# Altium PCB PCB1.PcbDoc
Units mm, origin at the board's own origin, x right, y up, seen from the top; angles counter-clockwise.
Board outline 89.03 x 95.25 mm, 2 copper layers (Top Layer, Bottom Layer); 53 components, 38 nets, 170 pads, 24 vias.
Unrouted connection lines stored in the file: 2.
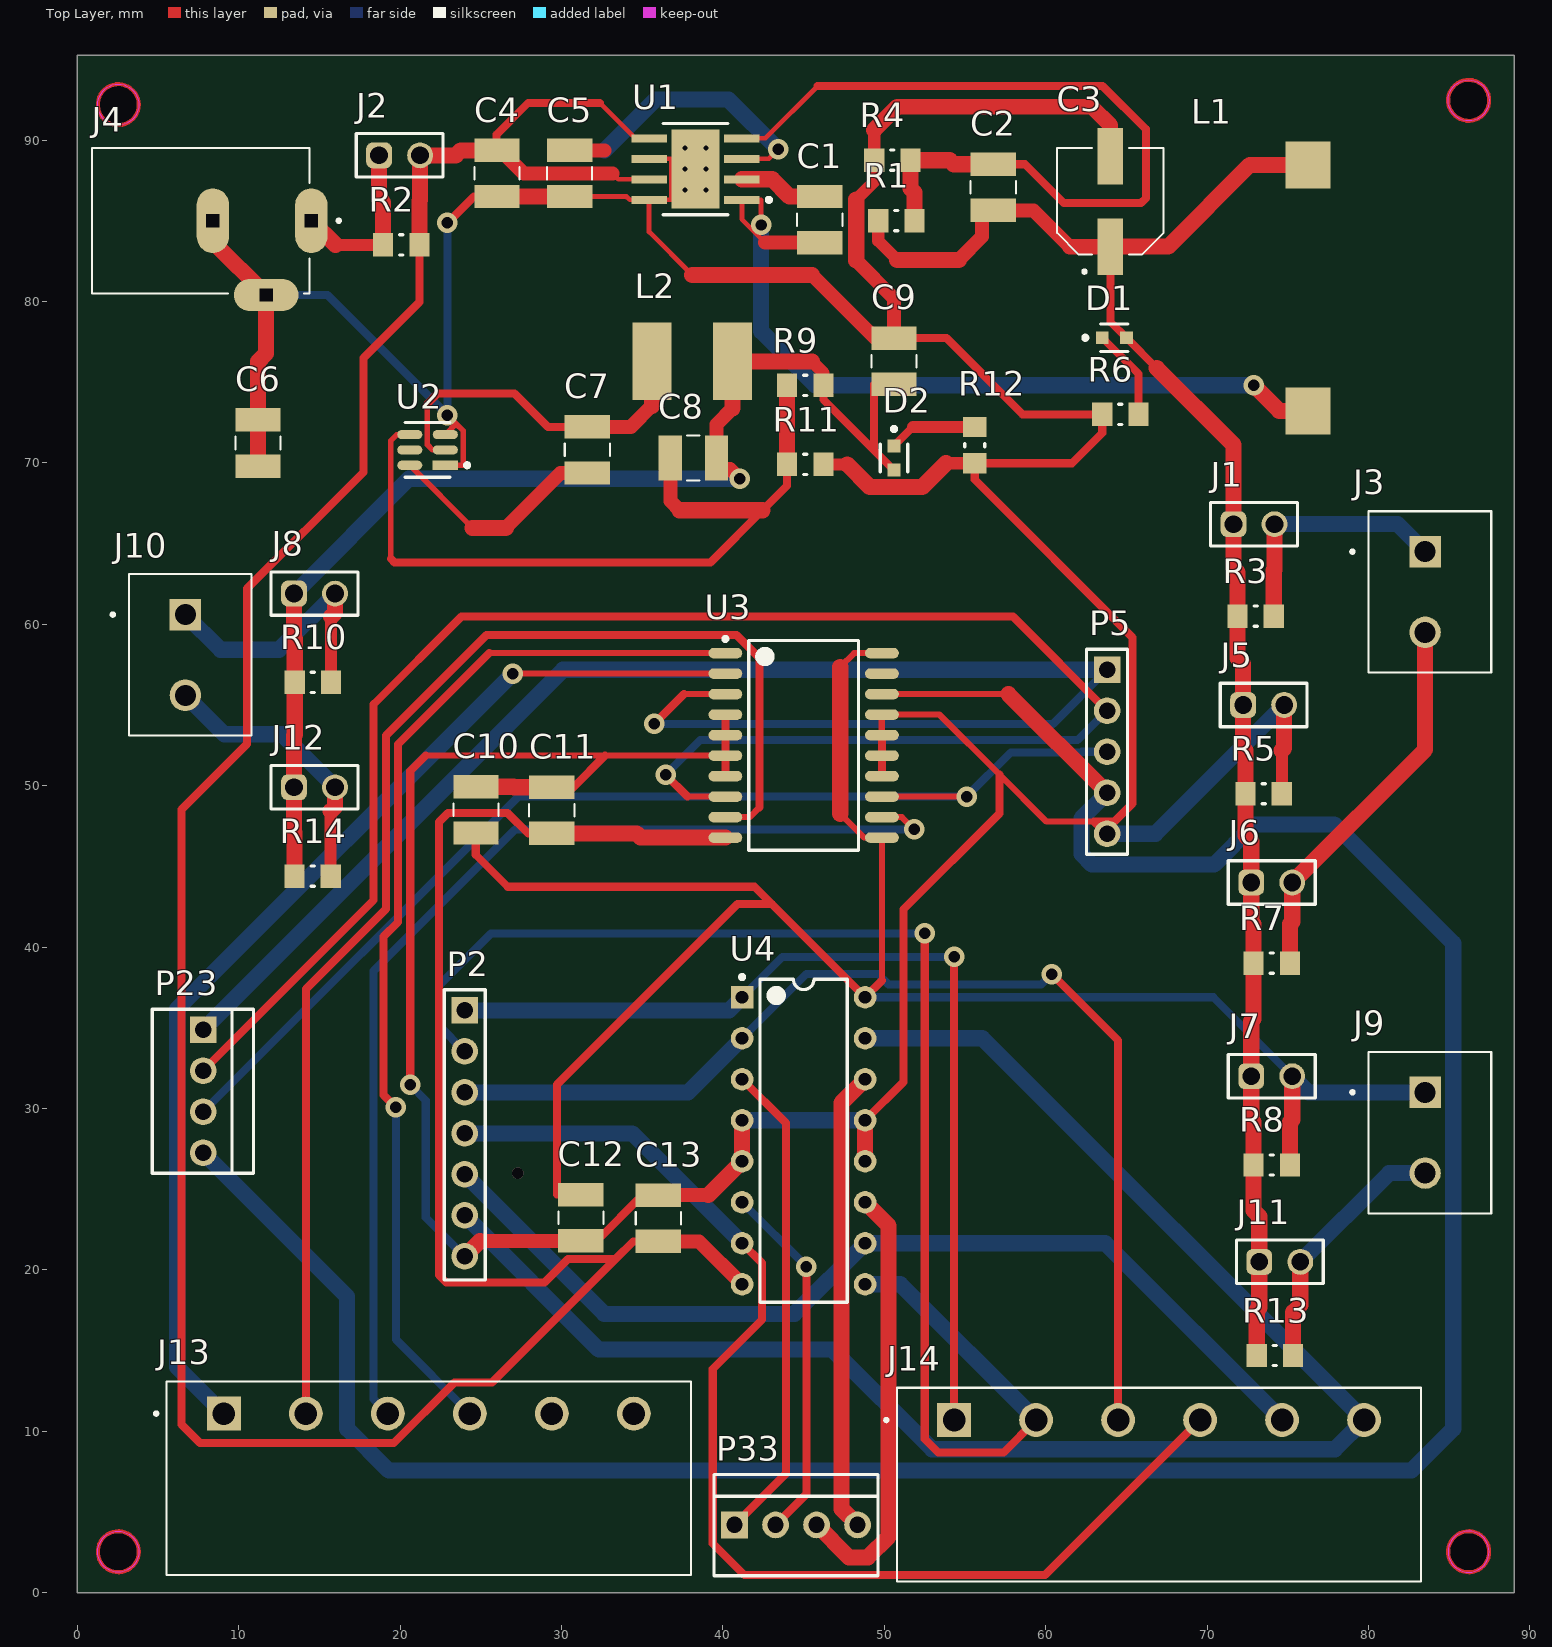
[diagram p0: Top Layer view]
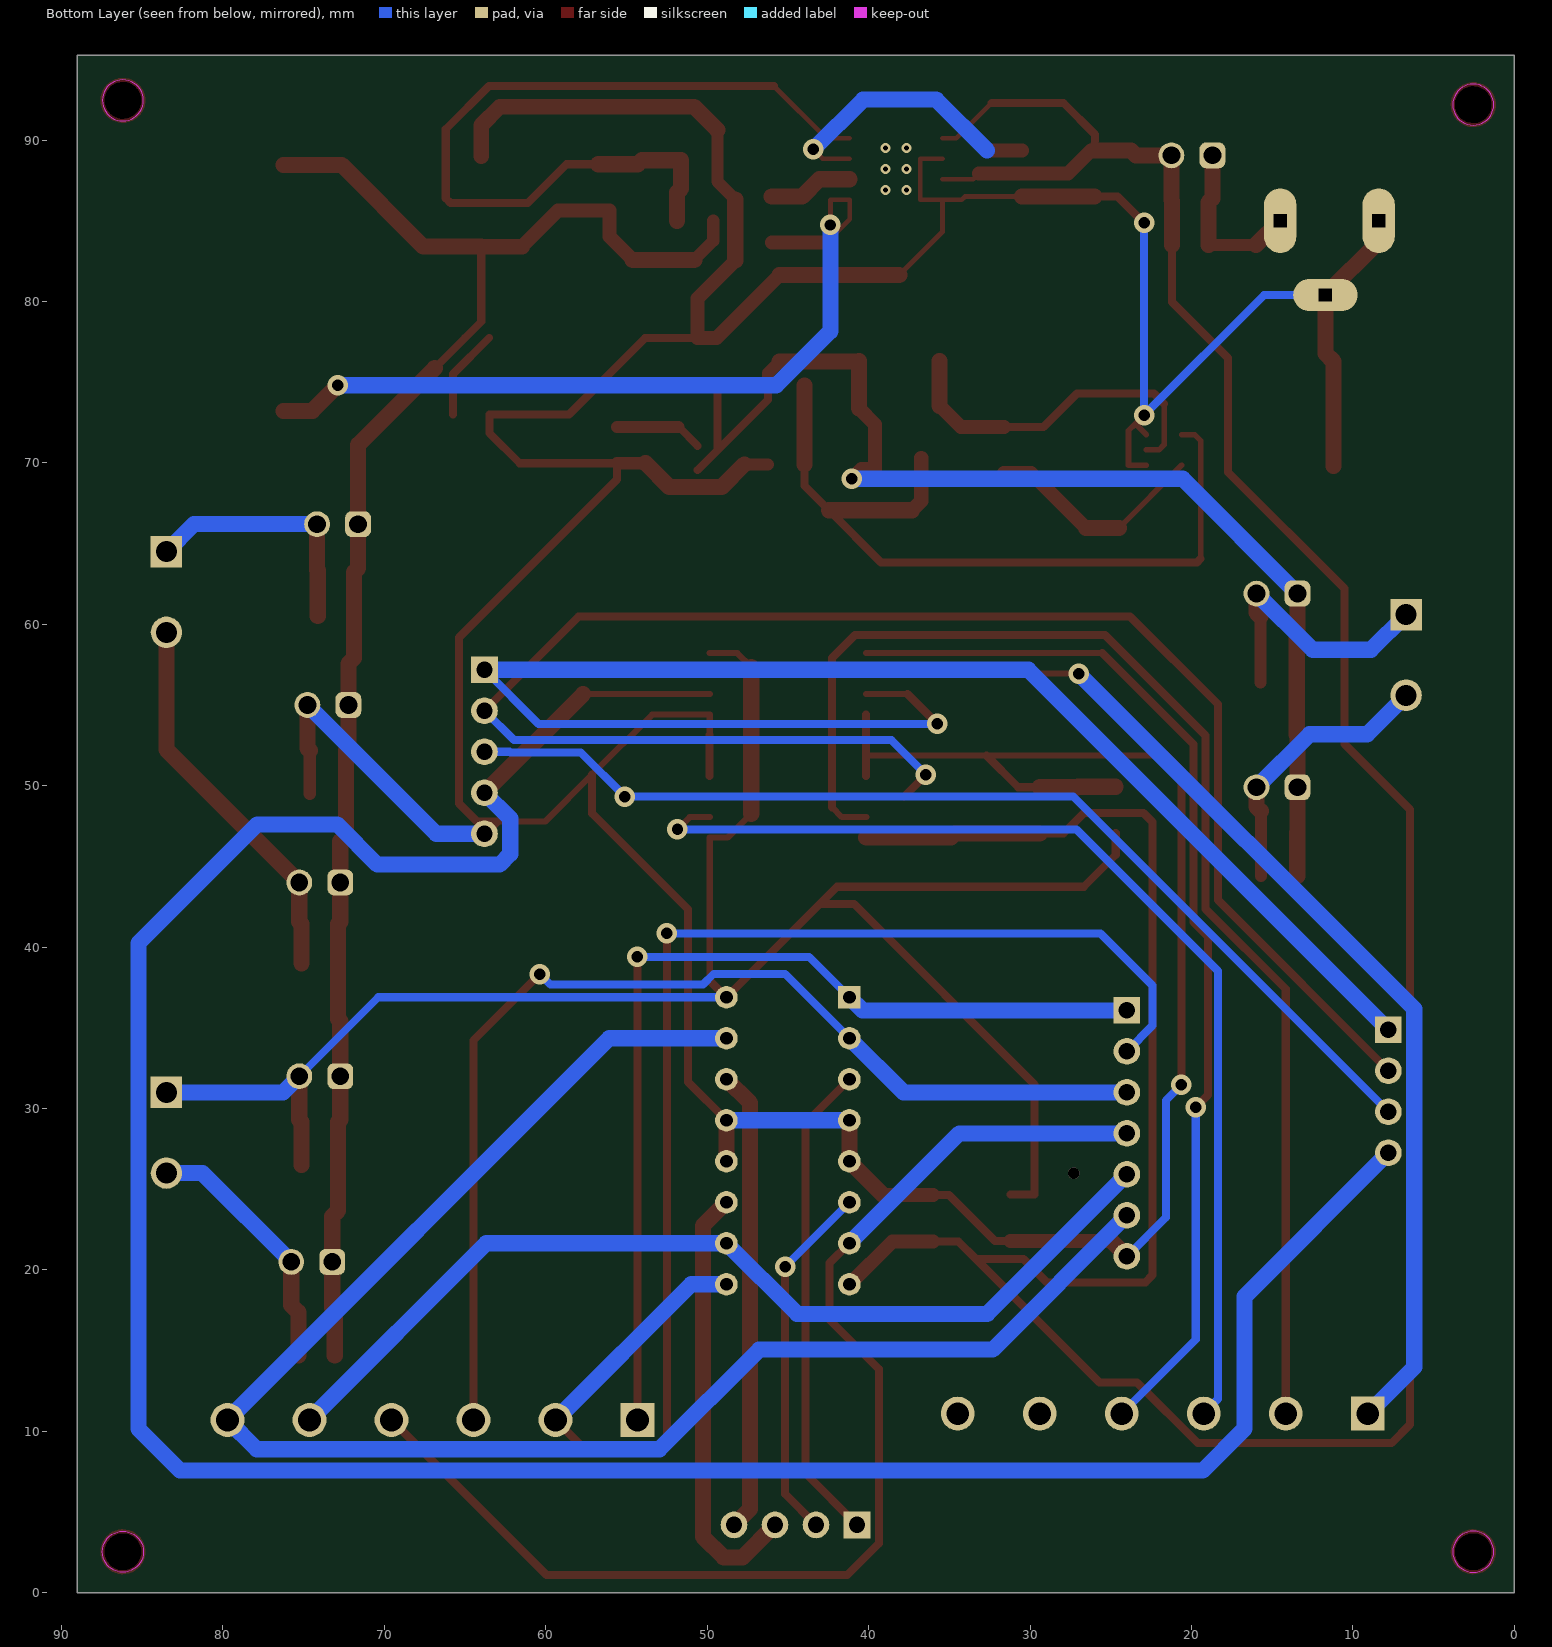
[diagram p1: Bottom Layer view, seen from below]

## Layer stack, top to bottom
Top Solder: solder mask 0.0102, Solder Resist, Dk 3.5
Top Layer: signal copper 0.0356
Dielectric 1: dielectric 0.32, FR-4, Dk 4.8
Bottom Layer: signal copper 0.0356
Bottom Solder: solder mask 0.0102, Solder Resist, Dk 3.5

## Board outline
0,0 89.027,0 89.027,95.25 0,95.25
cut-out: 84.93,2.54 ccw(c86.2,2.54) 86.2,1.27 ccw(c86.2,2.54) 87.47,2.54 ccw(c86.2,2.54) 86.2,3.81 ccw(c86.2,2.54)
cut-out: 86.2,91.186 cw(c86.2,92.456) 84.93,92.456 cw(c86.2,92.456) 86.2,93.726 cw(c86.2,92.456) 87.47,92.456 cw(c86.2,92.456)
cut-out: 2.54,90.92 cw(c2.54,92.19) 1.27,92.19 cw(c2.54,92.19) 2.54,93.46 cw(c2.54,92.19) 3.81,92.19 cw(c2.54,92.19)
cut-out: 2.54,1.27 cw(c2.54,2.54) 1.27,2.54 cw(c2.54,2.54) 2.54,3.81 cw(c2.54,2.54) 3.81,2.54 cw(c2.54,2.54)

## Design rules (kind name [scope] priority, off if disabled: settings)
Clearance [All] p1: gap=0.254 ignorepadtopadclearanceinfootprint=FALSE except(0: Arc-Hole Track-Hole SMDPad-Hole THPad-Hole Via-Hole Fill-Hole Poly-Hole Region-Hole Text-Hole; 0.127: Arc-SMDPad Track-SMDPad SMDPad-SMDPad)
PolygonConnect [All] p1: connectstyle=Relief reliefconductorwidth=0.254 reliefentries=4 polygonreliefangle="90 Angle" airgapwidth=0.254
RoutingVias [All] p1: holewidth=0.711 width=1.27 viastyle="Through Hole" minholewidth=0.711 minwidth=1.27 maxholewidth=0.711 maxwidth=1.27
SMDNeckDown [All] p1: percent=60.000
SolderMaskExpansion [All] p1: expansion=0.102 istentingtop=FALSE
Width [All] p1: maxlimit=1 minlimit=0.25 preferedwidth=0.5 minimp=50.000000 maximp=50.000000 favimp=50.000000
30 further rules are at their usual default settings.

## Classes and differential pairs
component class Headers: DPWR? J13 J14 P23 P33
component class "Motor Drivers": C10 C11 C12 C13 P2 P5 U3 U4

## Components (designator, comment, footprint, x,y, rotation, side; value= is the part's Value field where it differs from the comment)
C1 "100nF" "10 uF Cap" 46,85.07 r270 top
C2 "30pF" "10 uF Cap" 56.75,87.07 r90 top
C3 "120uF" "Capacitor 120uF" 64,86.2 r90 top
C4 "10uF" "10 uF Cap" 26,87.93 r270 top
C5 "2.2uF" "10 uF Cap" 30.5,87.93 r270 top
C6 "10uF" "10 uF Cap" 11.2,71.23 r90 top
C7 "100nF" "10 uF Cap" 31.6,70.8 r270 top
C8 "47pF" "10 uF Cap" 38.17,70.3 r180 top
C9 "47pF" "10 uF Cap" 50.6,76.3 r90 top
C10 "1uF" "10 uF Cap" 24.7,48.5 r90 top
C11 "1uF" "10 uF Cap" 29.4,48.47 r90 top
C12 "1uF" "10 uF Cap" 31.2,23.23 r270 top
C13 "1uF" "10 uF Cap" 36,23.2 r90 top
D1 "LTST-C190GKT" FP-LTST-C190GKT-MFG 64.25,77.75 r0 top
D2 "LTST-C190GKT" FP-LTST-C190GKT-MFG 50.6,70.3 r270 top
J1 "61300211121" 61300211121 72.9,66.2 r0 top
J2 "61300211121" 61300211121 19.97,89.05 r0 top
J3 "Screw Type Terminal" "2 Pin Terminal Blue Screw" 83.5,64.5 r270 top
J4 "DC Power Jack" GRAVITECH_CON-SOCJ-2155 8.4,85 r0 top
J5 "61300211121" 61300211121 73.5,55 r0 top
J6 "61300211121" 61300211121 74,44 r0 top
J7 "61300211121" 61300211121 74,32 r0 top
J8 "61300211121" 61300211121 14.7,61.9 r0 top
J9 "Screw Type Terminal" "2 Pin Terminal Blue Screw" 83.5,31 r270 top
J10 "Screw Type Terminal" "2 Pin Terminal Blue Screw" 6.7,60.6 r270 top
J11 "61300211121" 61300211121 74.5,20.5 r0 top
J12 "61300211121" 61300211121 14.7,49.9 r0 top
J13 "Pluggable Header 6pos" PHOENIX_1757284 5.54,1.1 r0 top
J14 "Pluggable Header 6pos" PHOENIX_1757284 50.78,0.7 r0 top
L1 "15uH" "15uH Inductor" 76.25,75.25 r0 top
L2 "10uH" "10uH Inductor" 38.1,76.3 r270 top
P2 "Header 7" HDR1X7 24,36.08 r270 top
P5 "Header 5" HDR1X5 63.8,57.18 r270 top
P23 "Molex_22-11-2042" MOLEX-22-11-2042 7.8,34.88 r270 top
P33 "Molex_22-11-2042" MOLEX-22-11-2042 40.72,4.2 r0 top
R1 "88.7k" RESC2112X05M 50.75,85 r180 top
R2 "0R" RESC2112X05M 20.075,83.5 r0 top
R3 "0R" RESC2112X05M 73,60.5 r0 top
R4 "22.1k" RESC2112X05M 50.5,88.75 r0 top
R5 "0R" RESC2112X05M 73.5,49.5 r0 top
R6 "160R" RESC2112X05M 64.625,73 r0 top
R7 "0R" RESC2112X05M 74,39 r0 top
R8 "0R" RESC2112X05M 74,26.5 r0 top
R9 "100k" RESC2112X05M 45.1,74.8 r0 top
R10 "0R" RESC2112X05M 14.6,56.4 r0 top
R11 "22.1k" RESC2112X05M 45.1,69.9 r180 top
R12 "50R" RESC2112X05M 55.6,71.1 r90 top
R13 "0R" RESC2112X05M 74.2,14.7 r0 top
R14 "0R" RESC2112X05M 14.575,44.4 r0 top
U1 "LMR23630ADDAR" FP-DDA0008E-MFG 38.3,88.2 r180 top
U2 "TPS54202DDCR" FP-DDC0006A-IPC_B 21.7,70.8 r180 top
U3 "L293DD" STM-SOIC-20_M 45,52.5 r0 top
U4 "L293DD" STM-L293D-16 45,28 r0 top

## Footprints (in the part's own frame and the unit in brackets; to place one, negate y for a bottom-side part, rotate by r counter-clockwise, add the part's x,y. Pads: shape width x height; smd on the part's side, far side on the other; paste and mask are expansions set on the pad)
"2 Pin Terminal Blue Screw" [mm]
  rect 1.95x1.95 / inner round 1.95 / far side rect 1.95x1.95 hole 1.3: 1(0,0)
  round 1.95 hole 1.3: 2(5,0)
  silkscreen extent -2.5,-4.6 7.5,4.1
"10 uF Cap" [mm] "1210 footprint"
  rect 1.45x2.81 smd: 1(-1.43,0) 2(1.43,0)
  silkscreen extent -0.39,-1.4 0.39,1.4
"10uH Inductor" [mm] "10 µH Unshielded Wirewound Inductor 2.6 A 60mOhm Max 2424 (6060 Metric)"
  rect 4.8x2.4 smd: 1(0,-2.5) 2(0,2.5)
"15uH Inductor" [mil] "FIXED IND 15UH 4A 36 MOHM SMD"
  rect 110x115 smd: 1(0,-80) 2(0,520)
  body extent -285,-146 306,582, height 267
61300211121 [mm] "Pin Header, pitch 2.54 mm, THT, Vertical, single row, 2p"
  rrect50% 1.6x1.6 hole 1.1: 1(-1.27,0)
  round 1.6 hole 1.1: 2(1.27,0)
  silkscreen extent -2.69,-1.35 2.69,1.35, body extent -2.54,-1.27 2.54,1.27, height 8.57
"Capacitor 120uF" [mm]
  rect 3.5x1.6 smd: 1(-2.8,0) 2(2.8,0)
  silkscreen extent -4.45,-3.3 3.3,3.3
FP-DDA0008E-MFG [mm]
  rect 2.2x0.5 smd paste-1000 mask+0: 1(-2.875,1.905) 2(-2.875,0.635) 3(-2.875,-0.635) 4(-2.875,-1.905) 5(2.875,-1.905) 6(2.875,-0.635) 7(2.875,0.635) 8(2.875,1.905)
  rect 2.95x4.9 smd paste-1000 mask-1000: 9(0,0)
  silkscreen extent -4.68,-2.83 2,2.83, body extent -4.08,-2.68 4.08,2.68, height 0.25
FP-DDC0006A-IPC_B [mm]
  rect 1.554x0.572 smd paste+0 mask+0: 1(-1.1,0.95)
  rrect100% 1.554x0.572 smd paste+0 mask+0: 2(-1.1,0) 3(-1.1,-0.95) 4(1.1,-0.95) 5(1.1,0) 6(1.1,0.95)
  silkscreen extent -2.58,-1.7 1.4,1.7, body extent -2.13,-1.7 2.13,1.7, height 0.25
FP-LTST-C190GKT-MFG [mm]
  rect 0.8x0.8 smd paste+0 mask+0: 1(-0.75,0) 2(0.75,0)
  silkscreen extent -1.92,-0.85 0.85,0.85, body extent -1.25,-0.55 1.25,0.55, height 0.25
GRAVITECH_CON-SOCJ-2155 [mm]
  oval 2x4 hole 0.8 square: 1(6.1,0) 3(0,0)
  oval 4x2 hole 0.8 square: 2(3.3,-4.6)
  silkscreen extent -7.5,-4.5 7.9,4.5, body extent -7.51,-5 6.59,4.25, height 11.1
HDR1X5 [mil] "Connector; Header; 5 Position"
  rect 65x65 hole 40: 1(0,0)
  round 65 hole 40: 2(100,0) 3(200,0) 4(300,0) 5(400,0)
  silkscreen extent -50,-50 450,50, body extent -45,-49 455,49, height 370
HDR1X7 [mil] "Connector; Header; 16 Position"
  rect 65x65 hole 40: 1(0,0)
  round 65 hole 40: 2(100,0) 3(200,0) 4(300,0) 5(400,0) 6(500,0) 7(600,0)
  silkscreen extent -50,-50 658,50, body extent -46,-49 654,49, height 370
MOLEX-22-11-2042 [mil] "CONN HEADER 4POS .100 VERT GOLD"
  rect 65x65 hole 40: 1(0,0)
  round 65 hole 40: 2(100,0) 3(200,0) 4(300,0)
  silkscreen extent -50,-124 350,123, body extent -47,-128 347,122, height 422
PHOENIX_1757284 [mm] "6 pos connector"
  rect 2.1x2.1 / inner round 2.1 / far side rect 2.1x2.1 hole 1.4: 01(3.54,10)
  round 2.1 hole 1.4: 02(8.62,10) 03(13.7,10) 04(18.78,10) 05(23.86,10) 06(28.94,10)
  silkscreen extent -0.75,0 32.48,12
RESC2112X05M [mm] "Chip Resistor, 2-Leads, Body 2.05x1.25mm, IPC Low Density"
  rect 1.25x1.45 smd: 1(-1.125,0) 2(1.125,0)
  silkscreen extent -0.1,-0.63 0.1,0.63, body extent -1.1,-0.7 1.1,0.7, height 0.5
STM-L293D-16 [mm] "DIP, 16-Leads, Body 20x6.85mm, Pitch 2.54mm"
  rect 1.4x1.4 hole 0.8: 1(-3.81,8.89)
  round 1.4 hole 0.8: 2(-3.81,6.35) 3(-3.81,3.81) 4(-3.81,1.27) 5(-3.81,-1.27) 6(-3.81,-3.81) 7(-3.81,-6.35) 8(-3.81,-8.89) 9(3.81,-8.89) 10(3.81,-6.35) 11(3.81,-3.81) 12(3.81,-1.27) 13(3.81,1.27) 14(3.81,3.81) 15(3.81,6.35) 16(3.81,8.89)
  silkscreen extent -3.93,-10 2.7,10.26, body extent -3.93,-10 3.93,10, height 5.1
STM-SOIC-20_M [mm] "SOIC, 20-Leads, Body 13x7.6mm, Pitch 1.27mm, IPC Low Density"
  oval 2.1x0.65 smd: 1(-4.85,5.715) 2(-4.85,4.445) 3(-4.85,3.175) 4(-4.85,1.905) 5(-4.85,0.635) 6(-4.85,-0.635) 7(-4.85,-1.905) 8(-4.85,-3.175) 9(-4.85,-4.445) 10(-4.85,-5.715) 11(4.85,-5.715) 12(4.85,-4.445) 13(4.85,-3.175) 14(4.85,-1.905) 15(4.85,-0.635) 16(4.85,0.635) 17(4.85,1.905) 18(4.85,3.175) 19(4.85,4.445) 20(4.85,5.715)
  silkscreen extent -4.97,-6.5 3.4,6.71, body extent -5.16,-6.5 5.16,6.5, height 2.65

## Part data
C1 C7: library part "Capacitor 0.1uF", "Ceramic Capacitor 1210", Package="1210 Samsung", Supplier Part Number 1=80-C1210C104K1R, Availability=Unavailable, Check_prices=https://www.snapeda.com/parts/CL32A106KBJNNNE/Samsung%20Electro-Mechanics/view-part/3598300/?ref=eda, MF="Samsung Electro-Mechanics", MP=CL32A106KBJNNNE, Price=None, SnapEDA_Link=https://www.snapeda.com/parts/CL32A106KBJNNNE/Samsung%20Electro-Mechanics/view-part/3598300/?ref=snap, Supplier 1=Mouser
C2: library part "Capacitor 30pF", "Ceramic Capacitor 1210", Package="1210 Samsung", Supplier Part Number 1=478-KGQ32DCG2D300JTCT-ND, Availability=Unavailable, Check_prices=https://www.snapeda.com/parts/CL32A106KBJNNNE/Samsung%20Electro-Mechanics/view-part/3598300/?ref=eda, MF="Samsung Electro-Mechanics", MP=CL32A106KBJNNNE, Price=None, SnapEDA_Link=https://www.snapeda.com/parts/CL32A106KBJNNNE/Samsung%20Electro-Mechanics/view-part/3598300/?ref=snap, Supplier 1=Digikey
C3: library part "Capacitor 120uF_1", "120 µF 10 V Aluminum - Polymer Capacitors Radial, Can - SMD 27mOhm 2000 Hrs @ 105°C", Package=None, Availability=Unavailable, MP=10SVPC120M, Price=None
C4 C6: library part "Capacitor 10uF", "Ceramic Capacitor 1210", Package="1210 Samsung", Supplier Part Number 1=CL32A106KBJNNNE, Availability=Unavailable, Check_prices=https://www.snapeda.com/parts/CL32A106KBJNNNE/Samsung%20Electro-Mechanics/view-part/3598300/?ref=eda, MF="Samsung Electro-Mechanics", MP=CL32A106KBJNNNE, Price=None, SnapEDA_Link=https://www.snapeda.com/parts/CL32A106KBJNNNE/Samsung%20Electro-Mechanics/view-part/3598300/?ref=snap, Supplier 1=Avnet
C5: library part "Capacitor 2.2uF", "Ceramic Capacitor 1210", Package="1210 Samsung", Supplier Part Number 1=41AH7123, Availability=Unavailable, Check_prices=https://www.snapeda.com/parts/CL32A106KBJNNNE/Samsung%20Electro-Mechanics/view-part/3598300/?ref=eda, MF="Samsung Electro-Mechanics", MP=CL32A106KBJNNNE, Price=None, SnapEDA_Link=https://www.snapeda.com/parts/CL32A106KBJNNNE/Samsung%20Electro-Mechanics/view-part/3598300/?ref=snap, Supplier 1=Avnet
C8 C9: library part "Capacitor 47pF", "Ceramic Capacitor 1210", Package="1210 Samsung", Supplier Part Number 1=478-KGQ32DCG2D300JTCT-ND, Availability=Unavailable, Check_prices=https://www.snapeda.com/parts/CL32A106KBJNNNE/Samsung%20Electro-Mechanics/view-part/3598300/?ref=eda, MF="Samsung Electro-Mechanics", MP=CL32A106KBJNNNE, Price=None, SnapEDA_Link=https://www.snapeda.com/parts/CL32A106KBJNNNE/Samsung%20Electro-Mechanics/view-part/3598300/?ref=snap, Supplier 1=Digikey
C10 C11 C12 C13: library part "Capacitor 1uF", "Ceramic Capacitor 1210", Package="1210 Samsung", Supplier Part Number 1=CL32B105KCJNNNE, Availability=Unavailable, Check_prices=https://www.snapeda.com/parts/CL32A106KBJNNNE/Samsung%20Electro-Mechanics/view-part/3598300/?ref=eda, MF="Samsung Electro-Mechanics", MP=CL32A106KBJNNNE, Price=None, SnapEDA_Link=https://www.snapeda.com/parts/CL32A106KBJNNNE/Samsung%20Electro-Mechanics/view-part/3598300/?ref=snap, Supplier 1="Arrow Electronics"
D1 D2: library part CMP-22017-000005-2, "LED GREEN CLEAR CHIP SMD", Case Code (Imperial)=0603, Case Code (Metric)=1608, Color=Green, Forward Current=30mA, Forward Voltage=2.1V, Lens Color=Colorless, Max Operating Temperature=85°C, Min Operating Temperature=-55°C, Package Quantity=1, Power Dissipation=100mW, Reverse Voltage=5V, Test Current=10mA, Voltage=2V, Case/Package=0603, Depth=0.8mm, Dominant Wavelength=569nm, Height=0.8mm, Illumination Color=Green, Lead Free="Lead Free", Length=1.6mm, Lens Style=Clear, Lens Transparency=Clear, Luminous Intensity=6mcd, Mount="Surface Mount", Number of Elements=1, Number of LEDs=1, Number of Pins=2, Packaging="Tape and Reel", Power Rating=100mW, Radiation Hardening=No, Viewing Angle=130°, Wavelength=565nm, Width=0.8mm
J1 J2 J5 J6 J7 J8 J11 J12: library part CMP-1712-00002-5, Color=Black, Contact Resistance=20mΩ, Current Rating=3A, Max Operating Temperature=125°C, Min Operating Temperature=-40°C, Operating Supply Voltage=250V, Connector Type="Male Pin", Contact Gender=Male, Contact Material=Copper, Contact Mating Length=5.9944mm, Contact Plating=Gold, Gender=Male, Height=8.94mm, Housing Material=PBT, Lead Free="Lead Free", Lead Pitch=2.54mm, Mount="Through Hole", NexarPartId=20081794, Number of Contacts=2, Number of Pins=2, Number of Positions=2, Number of Rows=1, Orientation=Vertical, Packaging=Bulk, Pitch=2.54mm, REACH SVHC="No SVHC", RoHS=Compliant, Termination="Through Hole", Voltage Rating=250V
J3 J9 J10: "2~24 Poles, Screw Type, Horizontal, 5.0 Pitch, 22~12 (AWG), Terminal Block Connector", Package=None, Availability="In Stock", Check_prices=https://www.snapeda.com/parts/TB002-500-02BE/CUI+Devices/view-part/?ref=eda, CUI_purchase_URL=https://www.cuidevices.com/product/interconnect/connectors/terminal-blocks/tb002-500-series?utm_source=snapeda.com&utm_medium=referral&utm_campaign=snapedaBOM, MF="CUI Devices", MP=TB002-500-02BE, Price=None, Purchase-URL=https://pricing.snapeda.com/search/part/TB002-500-02BE/?ref=eda, SnapEDA_Link=https://www.snapeda.com/parts/TB002-500-02BE/CUI+Devices/view-part/?ref=snap
J4: "DC Power Connectors Power Jack/Connector 2.1mm x 5.5mm", Package=None, Availability="In Stock", Check_prices=https://www.snapeda.com/parts/CON-SOCJ-2155/Gravitech/view-part/?ref=eda, MF=Gravitech, MP=CON-SOCJ-2155, Price=None, SnapEDA_Link=https://www.snapeda.com/parts/CON-SOCJ-2155/Gravitech/view-part/?ref=snap
J13 J14: "Pluggable Header 5.08mm 12AWG 320V 12A 6 Position COMBICON MSTBA Series", Package=None, Check_prices=https://www.snapeda.com/parts/1757284/Phoenix+Contact/view-part/?ref=eda, MF="Phoenix Contact", MP=1757284, SnapEDA_Link=https://www.snapeda.com/parts/1757284/Phoenix+Contact/view-part/?ref=snap
L1: library part Inductor, "15 µH Unshielded Wirewound Inductor 4 A 36mOhm Max Nonstandard", SimulationGenericComponent=True
L2: library part Inductor_2, "10 µH Unshielded Wirewound Inductor 2.6 A 60mOhm Max 2424 (6060 Metric)", SimulationGenericComponent=True
P2: "Header, 7-Pin Male", MPN=PEC07SFAN, PN=S1212E-07-ND, URL=http://www.digikey.ca/product-detail/en/PEC07SFAN/S1212E-07-ND
P5: "Header, 5-Pin Male", MPN=PEC05SFAN, PN=S1212E-05-ND, URL=http://www.digikey.ca/product-detail/en/PEC05SFAN/S1212E-05-ND/859446
P23 P33: "CONN HEADER 4POS .100 VERT GOLD", MPN=0022112042, PN=WM2702-ND, URL=http://www.digikey.ca/product-detail/en/0022112042/WM2702-ND
R1: library part "Resistor 88.7k", "88.7k 1206 smd", Supplier Part Number=RMCF1206FT10K0, Supplier Part Number 1=ERJ-8ENF8872V, Supplier="Arrow Electronics", Supplier 1="Arrow Electronics"
R2 R3 R5 R7 R8 R10 R13 R14: library part "Resistor 0R", "0R 1206 smd", Supplier Part Number=RMCF1206FT10K0, Supplier Part Number 1=84W7269, Supplier="Arrow Electronics", Supplier 1=Avnet
R4 R11: library part "Resistor 22.1k", "22.1k 1206 smd", Supplier Part Number=RMCF1206FT10K0, Supplier Part Number 1=RMCF1206FT22K1, Supplier="Arrow Electronics", Supplier 1=Avnet
R6: library part "Resistor 160R", "1206 smd", Supplier Part Number=RMCF1206FT10K0, Supplier Part Number 1=RMCF1206FT160R, Supplier="Arrow Electronics", Supplier 1="Arrow Electronics"
R9: library part "Resistor 100k", "100k 1206 smd", Supplier Part Number=RMCF1206FT10K0, Supplier="Arrow Electronics", Supplier 1="Arrow Electronics", Supplier Part Number 1=RMCF1206FT10K0
R12: library part "Resistor 50R", "50R 1206 smd", Supplier Part Number=RMCF1206FT10K0, Supplier Part Number 1=71-RCP1206W50R0GEB, Supplier="Arrow Electronics", Supplier 1=Mouser
U1: library part CMP-04918-000336-1, "IC REG BUCK ADJUSTABLE 3A 8SOPWR", Max Input Voltage=36V, Max Operating Temperature=125°C, Max Output Voltage=28V, Min Input Voltage=4V, Min Operating Temperature=-40°C, Min Output Voltage=1V, Output Current=3A, Quiescent Current=75uA, Switching Frequency=2.425MHz, Lead Free="Lead Free", Mount="Surface Mount", Number of Outputs=1, Number of Pins=8, Output Configuration=Positive, Output Type=Adjustable, Packaging="Tape and Reel", RoHS Compliant=Yes, Synchronous Rectifier=Yes
U2: library part CMP-04918-000439-1, "IC REG BUCK ADJ 2A TSOT23-6", Case/Package=SOT-23-6, Max Input Voltage=28V, Max Operating Temperature=125°C, Min Input Voltage=4.5V, Min Operating Temperature=-40°C, Min Output Voltage=596mV, Output Current=2A, Quiescent Current=40uA, Switching Frequency=500kHz, Lead Free="Lead Free", Max Output Voltage=28V, Mount="Surface Mount", Number of Outputs=1, Output Configuration=Positive, Output Type=Adjustable, Packaging="Tape and Reel", RoHS Compliant=Yes, Synchronous Rectifier=Yes
U3: library part CMP-1771-00003-1, "Push-Pull Four Channel Driver with Diodes, 4.5 to 36 V, 20-Pin SOIC, RoHS, Tube", Case Code (Imperial)=0603, Case Code (Metric)=1608, Max Operating Temperature="155 degC", Min Operating Temperature="-55 degC", Package Quantity=5000, Power Rating="100 mW", Resistance="15 kohm", Tolerance=1%, Voltage Rating="50 V", Case\Package=0603, ComponentLink1Description="Manufacturer URL", ComponentLink1URL=http://www.st.com/, ComponentLink2Description=Datasheet, ComponentLink2URL=http://www.st.com/content/ccc/resource/technical/document/datasheet/04/ac/22/f9/20/5d/43/a1/CD00000059.pdf/files/CD00000059.pdf/jcr:content/translations/en.CD00000059.pdf, DatasheetVersion=Jul-03, Height="0.45 mm", Length="1.6 mm", Mount="Surface Mount", PackageDescription="20-Pin Small Outline Integrated Circuit, Body 12.8 x 7.5 mm, Pitch 1.27 mm", PackageReference=SOIC-20, Packaging="Tape and Reel", REACH SVHC=Unknown, RoHSCompliant=true, Width="0.8 mm"
U4: library part CMP-2000-06524-1, "Push-Pull Four Channel Driver with Diode, 4.5 to 36 V, -40 to 150 degC, 16-Pin PDIP, RoHS, Tube", Current - Output / Channel=600mA, Current - Peak Output=1.2A, Manufacturer=STMicroelectronics, On-State Resistance=-, Operating Temperature=-40°C~150°C, Package / Case="16-DIP(0.300\",7.62mm)", Package Description="16-Pin Thru-Hole Dual-In-Line, Body 20 x 6.85 mm, Pitch 2.54 mm", Package Reference=DIP-16, PartNumber=L293D, Standard Package=25, Supplier Device Package=16-PowerDIP, Voltage - Supply=4.5V~36V, Category=IntegratedCircuits(ICs), Datasheet URL=http://www.st.com/st-web-ui/static/active/en/resource/technical/document/datasheet/CD00000059.pdf, Datasheet Version=07/2003, Dynamic Catalog=HalfBridge, Family=PMIC-MOSFET,BridgeDrivers-InternalSwitch, Input Type=Non-Inverting, Manufacturer URL=http://www.st.com/, Mounting Technology=ThroughHole, Mounting Type=ThroughHole, Number of Outputs=4, Other Names=497-2936-5, Other Related Documents=L293DViewAllSpecifications, Packaging=Tube, Series=-, Type=HalfBridge

## Via types
v1: diameter 1.27, hole 0.711, Top Layer to Bottom Layer, 17 vias
v2: diameter 0.63, hole 0.33, Top Layer to Bottom Layer, 6 vias
v3: diameter 0.711, hole 0.711, Top Layer to Bottom Layer, 1 vias

## Nets (pads, with @x,y where several pads share a name; then routed paths per layer and width w, separated by ;. In a path a pad name is that pad's centre, name@x,y a point inside that pad or via, vN(x,y) a via of type N, cw(c..) or ccw(c..) an arc to the next point about the centre after c; other vN are vias at no path point)
GND: C3.2 C4.2 C5.2 C6.1 C6.2 C9.2 C10.2 C11.2 C12.2 C13.2 J4.2 J4.3 J5.2 P2.7 P5.5 R4.1 R5.2 R6.1 R11.1 R12.1 U1.6 U1.8 U1.9 U2.1 U2.3 U3.4 U3.5 U3.6 U3.7 U3.14 U3.15 U3.16 U3.17 U4.4 U4.5 U4.12 U4.13 | length 344
  Top Layer w0.3: C5.2 34.023,86.5 34.228,86.295 U1.8 ; U1.6 36.805,88.835 36.805,86.295 U1.8 ; 38.1,81.636 35.425,84.311 U1.8
  Top Layer w0.343: U2.1 23.901,69.85 23.901,71.993 23.472,72.422 ; U2.3 23.472,72.422 ; v1(22.936,72.958) 23.472,72.422
  Top Layer w0.39: 21.588,51.865 32.699,51.865 U3.6 ; U3.16 49.835,53.135 49.835,54.405 U3.17 53.416,54.405 57.125,50.697 60.042,47.779 62.986,47.779
  Top Layer w0.5: v1(20.628,31.467) 20.628,50.905 21.588,51.865 ; v1(22.936,84.861) 24.575,86.5 C4.2 ; C11.2 30.734,49.9 32.699,51.865 ; C12.2 32.182,21.8 35.012,24.63 C13.2 ; U3.7 U3.6 U3.5 U3.4 ; U4.13 51.181,31.641 51.181,42.342 57.125,48.285 57.125,50.697 ; U3.14 U3.15 U3.16 ; C9.2 53.842,77.73 58.572,73 R6.1 63.5,71.857 61.618,69.975 R12.1 55.6,68.962 65.38,59.182 65.38,48.895 64.264,47.779 62.986,47.779 P5.5
  Top Layer w0.75: R11.1 47.701,69.9 ; 48.26,86.312 49.375,87.427 R4.1 49.375,90.625 ; 53.821,69.975 R12.1 ; R5.2 74.625,52.172
  Top Layer w0.87: 24.96,21.8 C12.2 ; C13.2 39.09,24.63 ; 45.523,81.636 49.428,77.73 C9.2 50.6,80.185 48.26,82.525
  Top Layer w0.96: 50.8,92.05 62.865,92.05 64,90.915 C3.2
  Top Layer w1: J4.3 8.4,83.7 J4.2 11.7,76.776 11.2,76.276 C6.2 C6.1 ; P2.7 24.96,21.8 ; C10.2 27.026,49.93 27.056,49.9 C11.2 ; C4.2 C5.2 ; 38.1,81.636 45.523,81.636 ; 39.09,24.63 U4.5 U4.4 ; 47.701,69.9 49.097,68.504 52.349,68.504 53.821,69.975 ; 48.26,82.525 48.26,86.312 ; U4.12 U4.13 ; 49.375,90.625 50.8,92.05 ; 74.625,52.172 74.77,52.317 J5.2
  Bottom Layer w0.5: J4.2 15.494,80.4 v1(22.936,72.958) v1(22.936,84.861) ; v1(20.628,31.467) 21.59,30.505 21.59,23.25 P2.7
  Bottom Layer w1: U4.4 U4.13 ; P5.5 66.79,47.02 J5.2
IC3V3A: J8.2 J10.1 R10.2 | length 17.2
  Top Layer w0.75: R10.2 15.725,60.477
  Top Layer w1: 15.725,60.477 15.97,60.722 J8.2
  Bottom Layer w1: J10.1 8.88,58.42 12.49,58.42 J8.2
IC3V3B: J10.2 J12.2 R14.2 | length 17.2
  Top Layer w0.75: R14.2 15.7,48.427
  Top Layer w1: 15.7,48.427 15.97,48.697 J12.2
  Bottom Layer w1: J10.2 9.112,53.188 12.682,53.188 J12.2
IC5V: J3.2 J6.2 R7.2 | length 24
  Top Layer w1: R7.2 75.125,41.427 75.27,41.572 J6.2 83.5,52.23 J3.2
MCU5V: J1.2 J3.1 R3.2 | length 15.8
  Top Layer w1: R3.2 74.125,63.322 74.17,63.367 J1.2
  Bottom Layer w1: J1.2 81.8,66.2 J3.1
MD5V: C10.1 C12.1 J7.2 J9.1 R8.2 U3.1 U3.11 U3.20 U4.16 | length 123.6
  Top Layer w0.39: 47.271,48.26 48.746,46.785 U3.11 49.85,37.93 ; 47.271,57.355 48.131,58.215 U3.20
  Top Layer w0.5: C10.1 24.689,47.07 24.689,45.72 26.67,43.739 41.961,43.739 43.028,42.672 ; C12.1 29.718,24.66 29.718,31.496 40.894,42.672 43.028,42.672 ; 49.85,37.93 U4.16 43.028,42.672
  Top Layer w1: 47.271,48.26 47.271,57.355 ; R8.2 75.125,29.159 75.27,29.304 J7.2
  Bottom Layer w0.5: U4.16 70.38,36.89 J7.2
  Bottom Layer w1: J7.2 76.27,31 J9.1
NetC1_1: C1.1 U1.2 | length 5.3
  Top Layer w1: U1.2 43.053,87.565 44.118,86.5 C1.1
NetC1_2: C1.2 L1.1 U1.1 | length 51.9
  Top Layer w0.3: v1(42.367,84.734) 42.367,86.295 U1.1 41.173,86.295 41.173,85.09 42.623,83.64
  Top Layer w0.87: 42.623,83.64 C1.2
  Top Layer w1: v1(72.878,74.803) 74.463,73.218 L1.1
  Bottom Layer w1: v1(42.367,84.734) 42.367,78.156 45.72,74.803 v1(72.878,74.803)
NetC2_1: C2.1 C3.1 D1.2 J1.1 J5.1 J6.1 J7.1 J11.1 L1.2 R1.2 R3.1 R5.1 R7.1 R8.1 R13.1 | length 106.3
  Top Layer w0.48: 64,78.75 D1.2 66.88,75.87
  Top Layer w0.5: 64,78.75 C3.1
  Top Layer w0.75: R1.2 49.625,83.75 50.8,82.575
  Top Layer w0.87: 54.61,82.575 56.058,84.023 56.058,85.64 C2.1 59.233,85.64 61.473,83.4
  Top Layer w0.96: 61.473,83.4 C3.1
  Top Layer w1: 50.8,82.575 54.61,82.575 ; C3.1 67.589,83.4 72.647,88.458 L1.2 ; 66.88,75.87 71.63,71.12 J1.1 71.63,63.466 71.875,63.221 R3.1 71.875,57.911 72.23,57.556 J5.1 72.23,52.317 72.375,52.172 R5.1 72.375,46.913 72.73,46.558 J6.1 72.73,41.572 72.875,41.427 R7.1 72.875,35.553 72.73,35.408 J7.1 72.73,29.304 72.875,29.159 R8.1 72.875,23.672 73.23,23.317 J11.1 73.23,17.656 73.075,17.501 R13.1
NetC2_2: C2.2 R1.1 R4.2 U1.4 | length 51.4
  Top Layer w0.3: U1.4 42.632,90.105 45.872,93.345
  Top Layer w0.5: 45.872,93.345 63.525,93.345 66.2,90.67 66.2,86.393 65.907,86.1 61.117,86.1 58.717,88.5 C2.2
  Top Layer w1: R1.1 51.875,86.741 51.625,86.991 R4.2 54.051,88.75 54.301,88.5 C2.2
NetC5_1: C5.1 U1.3 | length 18
  Top Layer w0.3: U1.3 42.85,88.835 v1(43.434,89.419)
  Top Layer w0.87: C5.1 32.667,89.36
  Bottom Layer w1: 32.667,89.36 35.814,92.507 40.346,92.507 v1(43.434,89.419)
NetC7_1: C7.1 L2.1 U2.2 | length 22.1
  Top Layer w0.343: 21.692,73.66 21.692,71.12 22.012,70.8 U2.2
  Top Layer w0.5: 21.692,73.66 22.327,74.295 27.094,74.295 29.159,72.23 C7.1
  Top Layer w0.87: C7.1 34.29,72.23 35.6,73.54
  Top Layer w1: 35.6,73.54 L2.1
NetC7_2: C7.2 U2.6 | length 14
  Top Layer w0.343: U2.6 20.608,69.85 24.494,65.964
  Top Layer w0.87: 26.543,65.964 29.949,69.37 C7.2
  Top Layer w1: 24.494,65.964 26.543,65.964
NetC8_1: C8.1 C9.1 D2.2 J8.1 J12.1 L2.2 R9.2 R10.1 R14.1 | length 76
  Top Layer w0.48: 46.225,73.925 49.352,70.798 D2.2
  Top Layer w0.5: 46.225,73.925 R9.2 ; 49.352,70.798 49.352,74.87 C9.1
  Top Layer w0.75: 45.514,76.276 46.225,75.565 R9.2
  Top Layer w0.87: 40.6,73.381 39.6,72.381 C8.1 39.6,69.621 40.437,69.621 v1(41.046,69.012)
  Top Layer w1: J8.1 13.43,59.151 13.475,59.106 R10.1 13.475,53.156 13.43,53.111 J12.1 13.43,47.137 13.45,47.117 R14.1 ; 40.6,73.381 L2.2@40.6,76.276 ; L2.2 L2.2@40.6,76.276 ; 45.514,76.276 L2.2@40.6,76.276
  Bottom Layer w1: J8.1 20.542,69.012 v1(41.046,69.012)
NetC8_2: C8.2 R9.1 R11.2 U2.4 | length 50.1
  Top Layer w0.343: 19.431,64.059 19.431,71.374 19.807,71.75 U2.4
  Top Layer w0.5: 19.431,64.059 19.66,63.83 39.225,63.83 42.459,67.064 43.975,68.58 R11.2
  Top Layer w0.87: C8.2 36.74,67.629 37.305,67.064
  Top Layer w1: 37.305,67.064 42.459,67.064 ; R11.2 R9.1
NetD1_1: D1.1 R6.2 | length 5.7
  Top Layer w0.48: D1.1 65.75,75.5
  Top Layer w0.5: R6.2 65.75,75.5
NetD2_1: D2.1 R12.2 | length 5.5
  Top Layer w0.48: D2.1 51.775,72.225
  Top Layer w0.75: 51.775,72.225 R12.2
NetJ2_1: J2.1 J4.1 R2.1 | length 10.7
  Top Layer w0.75: 16,83.5 R2.1
  Top Layer w1: J4.1 16,83.5 ; J2.1 18.7,86.381 18.95,86.131 R2.1
NetJ13_01: J13.01 U3.2 | length 68.8
  Top Layer w0.39: v1(26.973,56.945) U3.2
  Bottom Layer w1: J13.01 6.198,13.982 6.198,36.17 v1(26.973,56.945)
NetJ13_02: J13.02 U3.9 | length 82
  Top Layer w0.39: U3.9 41.656,48.055 42.266,48.665
  Top Layer w0.5: J13.02 14.16,37.401 19.12,42.361 19.12,53.105 25.349,59.334 40.843,59.334 42.266,57.912 42.266,48.665
NetJ13_03: J13.03 U3.12 | length 67.2
  Top Layer w0.39: U3.12 51.081,48.055 v1(51.841,47.295)
  Bottom Layer w0.5: J13.03 18.347,11.993 18.347,38.514 27.127,47.295 v1(51.841,47.295)
NetJ13_04: J13.04 | length 66.7
  Top Layer w0.39: 25.525,58.215 40.15,58.215
  Top Layer w0.5: v1(19.736,30.074) 18.978,30.832 18.978,40.646 19.874,41.542 19.874,52.564 25.525,58.215
  Bottom Layer w0.5: v1(19.736,30.074) 19.736,15.684 J13.04
NetJ14_01: J14.01 P2.1 U4.1 | length 60.4
  Top Layer w0.5: J14.01 v1(54.32,39.398)
  Bottom Layer w0.5: U4.1 43.698,39.398 v1(54.32,39.398)
  Bottom Layer w1: P2.1 40.38,36.08 U4.1
NetJ14_02: J14.02 P2.2 U4.9 | length 89.6
  Top Layer w0.5: v1(52.502,40.852) 52.502,9.533 53.34,8.695 57.395,8.695 J14.02
  Bottom Layer w0.5: P2.2 22.403,35.137 22.403,37.617 25.637,40.852 v1(52.502,40.852)
  Bottom Layer w1: U4.9 50.99,19.11 J14.02
NetJ14_03: J14.03 P2.3 U4.2 | length 69.3
  Top Layer w0.5: v1(60.376,38.329) 64.48,34.224 J14.03
  Bottom Layer w0.5: U4.2 45.184,38.344 49.595,38.344 50.267,37.673 59.72,37.673 v1(60.376,38.329)
  Bottom Layer w1: P2.3 37.84,31 U4.2
NetJ14_04: J14.04 P2.4 U4.7 | length 75.4
  Top Layer w0.5: U4.7 42.418,20.422 42.418,16.916 39.37,13.868 39.37,3.048 41.326,1.092 59.952,1.092 J14.04
  Bottom Layer w1: P2.4 34.38,28.46 U4.7
NetJ14_05: J14.05 P2.5 U4.10 | length 60.6
  Bottom Layer w1: P2.5 32.648,17.272 44.432,17.272 U4.10 63.69,21.65 J14.05
NetJ14_06: J14.06 P2.6 U4.15 | length 103.2
  Bottom Layer w1: P2.6 32.318,15.062 46.787,15.062 52.959,8.89 77.91,8.89 J14.06 56.07,34.35 U4.15
NetP5_1: P5.1 P23.1 U3.3 | length 99.9
  Top Layer w0.39: 37.59,55.675 U3.3
  Top Layer w0.5: v1(35.738,53.823) 37.59,55.675
  Bottom Layer w0.5: v1(35.738,53.823) 60.443,53.823 P5.1
  Bottom Layer w1: P23.1 30.1,57.18 P5.1
NetP5_2: P5.2 P23.2 U3.8 | length 110.4
  Top Layer w0.39: 37.797,49.325 U3.8
  Top Layer w0.5: P23.2 18.366,42.906 18.366,55.043 23.8,60.477 57.963,60.477 P5.2 ; v1(36.449,50.673) 37.797,49.325
  Bottom Layer w0.5: v1(36.449,50.673) 38.595,52.819 61.979,52.819 P5.2
NetP5_3: P5.3 P23.3 U3.13 | length 70.5
  Top Layer w0.39: U3.13 v1(55.094,49.325)
  Bottom Layer w0.5: P23.3 27.325,49.325 v1(55.094,49.325) 57.834,52.065 62.201,52.065 62.236,52.1 P5.3
NetP5_4: P5.4 P23.4 U3.18 | length 169.9
  Top Layer w0.39: U3.18 57.685,55.675
  Top Layer w1: 57.685,55.675 P5.4
  Bottom Layer w1: P23.4 16.713,18.347 16.713,10.16 19.304,7.569 82.652,7.569 85.242,10.16 85.242,40.234 77.876,47.6 72.923,47.6 70.434,45.11 62.865,45.11 62.205,45.771 62.205,47.965 P5.4
NetP33_1: P33.1 U4.3 | length 30
  Top Layer w0.5: P33.1 43.898,7.378 43.898,29.102 U4.3
NetP33_2: P33.2 U4.6 | length 22.4
  Top Layer w0.5: P33.2 45.17,6.11 v1(45.17,20.21)
  Bottom Layer w0.5: U4.6 v1(45.17,20.21)
NetP33_3: P33.3 U4.11 | length 27.1
  Top Layer w1: P33.3 47.808,2.192 48.979,2.192 50.267,3.48 50.267,22.733 U4.11
NetP33_4: P33.4 U4.14 | length 28.6
  Top Layer w1: P33.4 47.346,5.194 47.346,30.346 U4.14
RPi5V: J9.2 J11.2 R13.2 | length 16
  Top Layer w1: R13.2 75.325,17.374 75.77,17.819 J11.2
  Bottom Layer w1: J11.2 81.27,26 J9.2
"V BATT": C4.1 C11.1 C13.1 J2.2 R2.2 U1.5 U1.7 U3.10 U4.8 | length 211.9
  Top Layer w0.3: 32.371,92.304 34.569,90.105 U1.5 ; 33.158,87.935 33.528,87.565 U1.7
  Top Layer w0.5: R2.2 21.2,79.959 17.729,76.488 17.729,69.418 10.516,62.205 10.516,52.578 6.452,48.514 6.452,10.414 7.595,9.271 19.609,9.271 23.368,13.03 25.705,13.03 33.35,20.676 ; C4.1 25.984,90.348 27.94,92.304 32.371,92.304 ; C11.1 27.94,47.04 26.663,48.317 22.968,48.317 22.403,47.752 22.403,19.685 22.86,19.228 28.956,19.228 30.404,20.676 33.35,20.676 ; C13.1 34.445,21.77 33.35,20.676
  Top Layer w0.87: C4.1 26.235,89.36 27.661,87.935 33.158,87.935 ; C13.1 38.53,21.77 U4.8
  Top Layer w1: R2.2 21.2,86.233 21.24,86.273 J2.2 23.444,89.05 23.754,89.36 C4.1 ; C11.1 34.646,47.04 34.901,46.785 U3.10
pads on no net: J13.05 J13.06 U2.5 U3.19
copper on no net: | length 31.9
  Top Layer w0.254: 3.81,2.54 ccw(c2.54,2.54) 3.81,2.54 ; 3.81,92.19 ccw(c2.54,92.19) 3.81,92.19 ; 87.47,2.54 ccw(c86.2,2.54) 87.47,2.54 ; 87.47,92.456 ccw(c86.2,92.456) 87.47,92.456
  other v2: 37.65,86.9 38.95,86.9 37.65,88.2 38.95,88.2 37.65,89.5 38.95,89.5
  other v3: 27.3,26